# EAGLE board E-InkSmartMonitor (EAGLE 9.6.2)
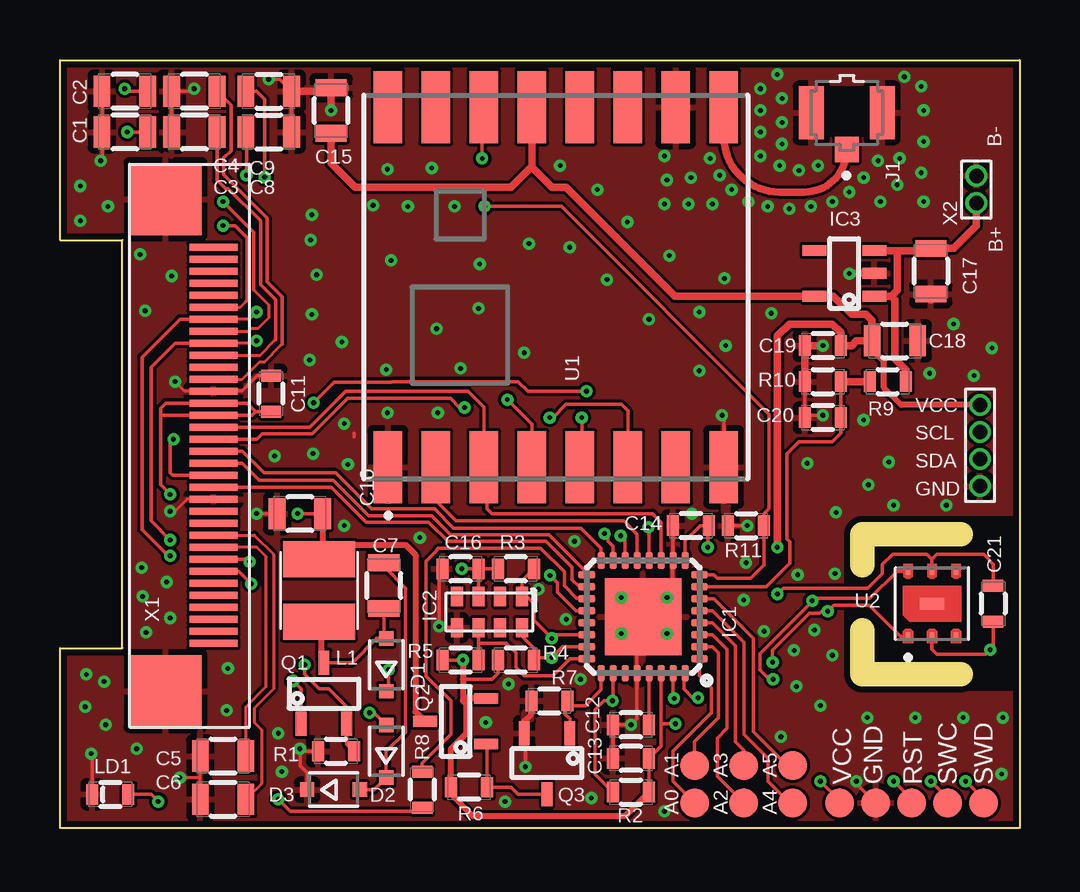
[diagram p0: board, top side]
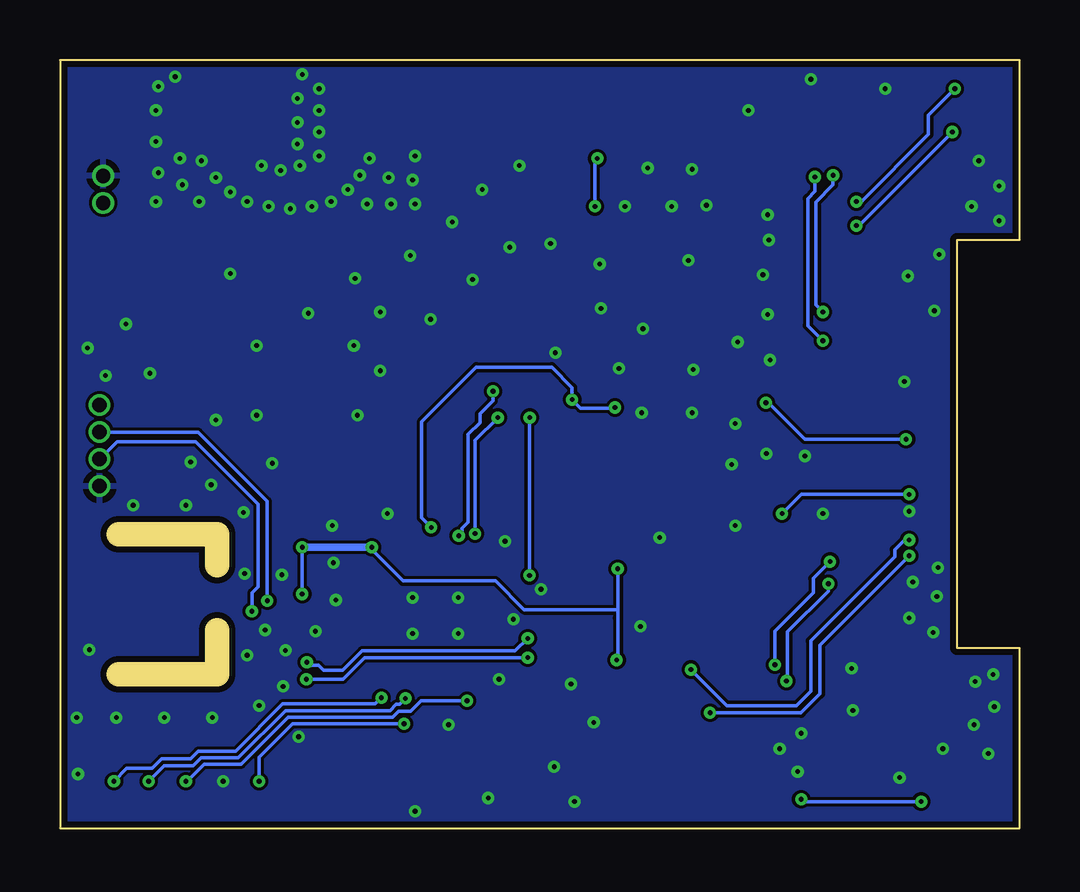
[diagram p1: board, bottom side, seen from below]

Size 40 x 32 mm. Coordinates in mm from the lower left corner, seen from the top.
Outline: 33.45,10.95 33.45,12.25 37.55,12.25
Outline: 33.45,8.25 33.45,6.4 37.55,6.4
Outline: 0,7.5 2.6,7.5 2.6,24.5 0,24.5 0,32 40,32 40,0 0,0 0,7.5
Copper layers (1*16): Top 0.035mm / dielectric 1.5mm / Bottom 0.035mm
Design rules "default": minimum track width 5mil, minimum drill 0.2mm, track to track 5mil, track to pad 6mil, pad to pad 6mil, via to via 6mil, smd to smd 6mil, copper to edge 10mil, drill to drill 0.4mm, minimum pad ring 6mil, minimum via ring 6mil, stop-mask expansion 4mil, vias tented up to drill 20mil, thermal gap 10mil

## Footprints (pad centres in the part's own frame; a part is rotated, then mirrored left to right if it is on the bottom)
TP = smd 1.2 x 1.2: P$1 0,0
0805 = smd 1.3 x 0.7: 1 0,0.95; 2 0,-0.95
0603 = smd 0.85 x 0.5: 1 0,0.75; 2 0,-0.75
SOD323-R = smd 0.6 x 0.6: A 1.1,0; C -1.1,0
MLF32-TH = smd 0.7 x 0.3: 1 -2.35,1.75; 2 -2.35,1.25; 3 -2.35,0.75; 4 -2.35,0.25; 5 -2.35,-0.25; 6 -2.35,-0.75; 7 -2.35,-1.25; 8 -2.35,-1.75; 17 2.35,-1.75; 18 2.35,-1.25; 19 2.35,-0.75; 20 2.35,-0.25; 21 2.35,0.25; 22 2.35,0.75; 23 2.35,1.25; 24 2.35,1.75 | smd 0.3 x 0.7: 9 -1.75,-2.35; 10 -1.25,-2.35; 11 -0.75,-2.35; 12 -0.25,-2.35; 13 0.25,-2.35; 14 0.75,-2.35; 15 1.25,-2.35; 16 1.75,-2.35; 25 1.75,2.35; 26 1.25,2.35; 27 0.75,2.35; 28 0.25,2.35; 29 -0.25,2.35; 30 -0.75,2.35; 31 -1.25,2.35; 32 -1.75,2.35 | smd 3.2 x 3.2: TH 0,0
C7_RTC = smd 0.8 x 0.5: 1 -0.65,1.35; 2 -0.65,0.45; 3 -0.65,-0.45; 4 -0.65,-1.35; 5 0.65,-1.35; 6 0.65,-0.45; 7 0.65,0.45; 8 0.65,1.35
SOT-23(5) = smd 0.45 x 1: 1 -0.95,-1.25; 2 0,-1.25; 3 0.95,-1.25; 4 0.95,1.25; 5 -0.95,1.25
IPEX_20279-001E-03 = smd 1.05 x 1: 1 1.525,0 | smd 2.2 x 1.05: 2 0,1.475; 3 0,-1.475
3232 = smd 1.5 x 3: M -1.3,0; P 1.3,0
0603_P = smd 0.85 x 0.5: 1 0,0.75; 2 0,-0.75
SOT-23(3) = smd 0.45 x 1: 1 -0.95,-1.25; 2 0.95,-1.25; 3 0,1.29
MOD_COM-13909 = smd 3 x 1.2: 1 -7.5,7; 2 -7.5,5; 3 -7.5,3; 4 -7.5,1; 5 -7.5,-1; 6 -7.5,-3; 7 -7.5,-5; 8 -7.5,-7; 9 7.5,-7; 10 7.5,-5; 11 7.5,-3; 12 7.5,-1; 13 7.5,1; 14 7.5,3; 15 7.5,5; 16 7.5,7
XDCR_SHT21 = smd 0.3 x 0.2: 1 -1.35,1; 2 -1.35,0; 3 -1.35,-1; 4 1.35,-1; 5 1.35,0; 6 1.35,1 | smd 0.5 x 1: 7 0,0
FFC_3405EINK = smd 3 x 3: M1 -10,0; M2 10.5,0 | smd 0.3 x 2: P$1 -8,-2; P$2 -7.5,-2; P$3 -7,-2; P$4 -6.5,-2; P$5 -6,-2; P$6 -5.5,-2; P$7 -5,-2; P$8 -4.5,-2; P$9 -4,-2; P$10 -3.5,-2; P$11 -3,-2; P$12 -2.5,-2; P$13 -2,-2; P$14 -1.5,-2; P$15 -1,-2; P$16 -0.5,-2; P$17 0,-2; P$18 0.5,-2; P$19 1,-2; P$20 1.5,-2; P$21 2,-2; P$22 2.5,-2; P$23 3,-2; P$24 3.5,-2; P$25 4,-2; P$26 4.5,-2; P$27 5,-2; P$28 5.5,-2; P$29 6,-2; P$30 6.5,-2; P$31 7,-2; P$32 7.5,-2; P$33 8,-2; P$34 8.5,-2
PIN_1MM_X2 = drill 0.6 pad 0.813: P$1 0.546,0.6; P$2 1.673,0.6
PIN_1MM_X4 = drill 0.6 pad 0.813: P$1 0.546,0.6; P$2 1.673,0.6; P$3 2.8,0.6; P$4 3.927,0.6

## Placement (x,y rotation side)
A0  TEST_POINT_D2MM  [TP]  26.45,1.05 0 top
A1  TEST_POINT_D2MM  [TP]  26.45,2.6 0 top
A2  TEST_POINT_D2MM  [TP]  28.5,1.05 0 top
A3  TEST_POINT_D2MM  [TP]  28.5,2.6 0 top
A4  TEST_POINT_D2MM  [TP]  30.55,1.05 0 top
A5  TEST_POINT_D2MM  [TP]  30.55,2.6 0 top
C1  1uf  [0805]  2.7,29 270 top
C2  1uf  [0805]  2.7,30.7 270 top
C3  1uf  [0805]  5.6,29 270 top
C4  1uf  [0805]  5.6,30.7 270 top
C5  1uf  [0805]  6.8,3 90 top
C6  1uf  [0805]  6.8,1.2 90 top
C7  4.7uf  [0805]  13.5,10.1 180 top
C8  1uf  [0805]  8.7,29 90 top
C9  1uf  [0805]  8.7,30.7 90 top
C10  10uf  [0805]  10,13.1 270 top
C11  0.1uf  [0603]  8.8,18.1 180 top
C12  0.1uf  [0603]  23.8,4.3 270 top
C13  0.1uf  [0603]  23.8,2.9 270 top
C14  0.1uf  [0603]  26.3,12.6 270 top
C15  1uf  [0805]  11.3,29.9 180 top
C16  0.1uf  [0603]  16.7,10.8 270 top
C17  1uf  [0805]  36.3,23.2 0 top
C18  150uf  [0805]  34.8,20.3 90 top
C19  0.1uf  [0603]  31.8,20.1 270 top
C20  0.1uf  [0603]  31.8,17.1 270 top
C21  0.1uf  [0603]  38.9,9.35 0 top
D1  [SOD323-R]  13.6,6.8 90 top
D2  [SOD323-R]  13.6,3.2 90 top
D3  [SOD323-R]  11.4,1.6 0 top
GND  TEST_POINT_D2MM  [TP]  34,1.05 0 top
IC1  SAMD20E17A-U  [MLF32-TH]  24.31,8.8 180 top
IC2  RTC_RV-8803-C7  [C7_RTC]  17.9,9 270 top
IC3  LDO_3.3V_SOT23(5)  [SOT-23(5)]  32.7,23.11 90 top
J1  20279-001E-03  [IPEX_20279-001E-03]  32.8,29.8 270 top
L1  450mR  [3232]  10.8,9.9 270 top
LD1  GLD  [0603_P]  2.1,1.4 90 top
Q1  BSS123SOT-23-3  [SOT-23(3)]  11,5.6 0 top
Q2  P_CH_SOT23SOT-23-3  [SOT-23(3)]  16.5,4.45 90 top
Q3  BSS123SOT-23-3  [SOT-23(3)]  20.3,2.7 180 top
R1  0R47  [0603]  11.5,3.2 90 top
R2  100K  [0603]  23.8,1.5 90 top
R3  100K  [0603]  19,10.8 270 top
R4  100K  [0603]  19,7 270 top
R5  100K  [0603]  16.7,7 270 top
R6  100K  [0603]  17.05,1.7 270 top
R7  100K  [0603]  20.4,5.3 90 top
R8  1K  [0603]  15.1,1.6 0 top
R9  100K  [0603]  34.5,18.6 90 top
R10  10K  [0603]  31.8,18.6 90 top
R11  10K  [0603]  28.6,12.6 90 top
RST  TEST_POINT_D2MM  [TP]  35.5,1.05 0 top
SWC  TEST_POINT_D2MM  [TP]  37,1.05 0 top
SWD  TEST_POINT_D2MM  [TP]  38.5,1.05 0 top
U1  COM-13909  [MOD_COM-13909]  20.67,22.54 90 top
U2  SHT21  [XDCR_SHT21]  36.35,9.35 90 top
VCC  TEST_POINT_D2MM  [TP]  32.5,1.05 0 top
X1  FFC_3405EINK  [FFC_3405EINK]  4.4,15.7 90 top
X2  PINHEADER_1MM_X22X_1MM_PIN  [PIN_1MM_X2]  38.8,25.5 90 top
X3  PINHEADER_1MM_X4  [PIN_1MM_X4]  38.95,13.7 90 top

## Library data of the parts
A0 A1-A5 C1-C21 GND L1 LD1 Q1-Q3 R1-R11 RST SWC SWD VCC = passive_components
D1-D3 = diode
IC1 = ATSAMD21J18A-AU
IC2 IC3 = my_IC
J1 = 20279-001E-03; AVAILABILITY: In Stock; CHECK_PRICES: https://www.snapeda.com/parts/20279-001E-03/I-PEX/view-part/?ref=eda; DESCRIPTION: 1 POS Vertical SMD Small form factor with big performance through 6 GHz connector,MHF, RF, micro-coaxial MHF I Receptacle; MF: I-PEX; MP: 20279-001E-03; PACKAGE: None; PRICE: None; PURCHASE-URL: https://www.snapeda.com/api/url_track_click_mouser/?unipart_id=3221458&manufacturer=I-PEX&part_name=20279-001E-03&search_term=None; SNAPEDA_LINK: https://www.snapeda.com/parts/20279-001E-03/I-PEX/view-part/?ref=snap
U1 = DL-RFM69HC; AVAILABILITY: Not in stock; CHECK_PRICES: https://www.snapeda.com/parts/RFM69HCW-315S2/HOPERF/view-part/?ref=eda; DESCRIPTION: General ISM < 1GHz Transceiver Module 915MHz Surface Mount; MF: HOPERF; MP: RFM69HCW-315S2; PACKAGE: Module SparkFun Electronics; PRICE: None; SNAPEDA_LINK: https://www.snapeda.com/parts/RFM69HCW-315S2/HOPERF/view-part/?ref=snap
U2 = SHT21; AVAILABILITY: In Stock; CHECK_PRICES: https://www.snapeda.com/parts/SHT21/Sensirion+AG/view-part/?ref=eda; DESCRIPTION: SENSOR HUMID/TEMP 3V I2C 2% SMD; MF: Sensirion AG; MP: SHT21; PACKAGE: DFN-6 Sensirion; PRICE: None; PURCHASE-URL: https://www.snapeda.com/api/url_track_click_mouser/?unipart_id=46060&manufacturer=Sensirion AG&part_name=SHT21&search_term=None; SNAPEDA_LINK: https://www.snapeda.com/parts/SHT21/Sensirion+AG/view-part/?ref=snap
X1-X3 = Custom connectors

## Nets
!EP_CS: IC1.16 X1.P$17
!RESET: IC1.26 R2.1 RST.P$1
!RF_CS: IC1.15 U1.5
!RST: IC1.14 X1.P$15
CLK: IC1.12 U1.4 X1.P$18
EP_BUSY: IC1.18 X1.P$14
EP_DC: IC1.17 X1.P$16
EP_EN: IC1.25 Q3.1 R7.2
EP_VCC: C10.1 C11.1 L1.M Q2.3 X1.P$20 X1.P$21
GDR_EP: Q1.1 X1.P$7
GND: C1.2 C2.2 C3.2 C4.2 C5.1 C6.1 C8.2 C9.2 C10.2 C11.2 C12.2 C13.2 C14.2 C15.2 C16.2 C17.2 C18.2 C19.2 C20.2 C21.2 D3.C GND.P$1 IC1.10 IC1.28 IC1.TH IC2.5 IC3.2 J1.2 J1.3 LD1.1 Q3.2 R1.1 R7.1 R10.1 R11.1 U1.1 U1.8 U1.10 U2.2 X1.M1 X1.M2 X1.P$13 X1.P$22 X2.P$2 X3.P$1
LD: IC1.19 R8.1
MISO: IC1.13 U1.2
MOSI: IC1.11 U1.3 X1.P$19
N$1: J1.1 U1.9
N$2: Q2.1 Q3.3 R6.1
N$3: C5.2 X1.P$9
N$4: C6.2 X1.P$10
N$5: C7.1 D1.A L1.P Q1.3
N$7: LD1.2 R8.2
N$8: C7.2 D2.C D3.A
N$15: C4.1 X1.P$23
N$16: C3.1 X1.P$25
N$18: C2.1 X1.P$27
N$20: C1.1 X1.P$29
PA00: A0.P$1 IC1.1
PA01: A1.P$1 IC1.2
PA02: A2.P$1 IC1.3
PA03: A3.P$1 IC1.4
PA04: A4.P$1 IC1.5
PA05: A5.P$1 IC1.6
PREVGH: C9.1 D1.C X1.P$26
PREVGL: C8.1 D2.A X1.P$28
RF_INT: IC1.8 R11.2 U1.14
RF_RST: IC1.20 U1.6
RSENSE_EP: Q1.2 R1.2 X1.P$8
RTC_INT: IC1.24 IC2.6 R5.1
SCL: IC1.23 IC2.8 R4.1 U2.6 X3.P$3
SDA: IC1.22 IC2.1 R3.1 U2.1 X3.P$2
SWC: IC1.31 SWC.P$1
SWD: IC1.32 SWD.P$1
VCC3V3: C13.1 C14.1 C15.1 C16.1 C18.1 C19.1 C21.1 IC1.9 IC1.30 IC2.3 IC3.5 Q2.2 R2.2 R3.2 R4.2 R5.2 R6.2 U1.13 U2.5 VCC.P$1 X3.P$4
VCORE: C12.1 IC1.29
VIN: C17.1 IC3.1 IC3.3 R9.2 X2.P$1
VMON: C20.1 IC1.7 R9.1 R10.2

## Tracks (layer width: path | path; a pad name or v marks a point on that pad's centre or on a via)
!EP_CS
  Top 0.152: X1.P$17 7.6,15.7 8.5,14.8 11.49,14.8 12.99,13.3 15.61,13.3 16.41,12.5 21.72,12.5 22.56,11.66 IC1.16
!RESET  (via drill 0.2)
  Top 0.15: IC1.26 23.06,5.33 v23.03,5.3 22.68,5.3 22.3,4.92 22.3,2.25 R2.1 | v34.75,1.95 35.5,1.2 RST.P$1
  Bottom 0.15: v23.03,5.3 24.95,5.3 25.38,4.87 25.88,4.87 26.13,4.62 30.48,4.62 32.45,2.65 34,2.65 34.7,1.95 v34.75,1.95
!RF_CS  (via drill 0.2)
  Top 0.152: IC1.15 23.06,11.74 22.84,11.95 22.84,12.13 v22.7,12.27 | v21.75,17.1 21.75,15.12 U1.5
  Bottom 0.152: v22.7,12.27 22.7,16.15 v21.75,17.1
!RST  (via drill 0.2)
  Top 0.15: 11.4,18.55 v10.58,17.72
  Top 0.152: X1.P$15 4.7,14.7 4.6,14.8 4.6,16.07 v4.73,16.2 | IC1.14 23.56,11.99 v23.37,12.17 | v21.95,18.2 19.5,18.2 19.1,18.6 13.85,18.6 13.82,18.57 11.42,18.57 11.4,18.55
  Bottom 0.152: v4.73,16.2 8.95,16.2 10.48,17.72 v10.58,17.72 | v23.37,12.17 23.37,12.22 23.23,12.37 23.23,12.49 22.98,12.74 22.98,16.42 22.5,16.89 22.5,17.25 21.95,17.8 v21.95,18.2
CLK  (via drill 0.2)
  Top 0.15: v16.86,17.52 16.66,17.52 16.28,17.9 11.99,17.9 10.52,16.42 8.42,16.42 8.2,16.2 X1.P$18 | v18.65,17.85 19.67,16.83 U1.4
  Top 0.152: IC1.12 24.56,12.49 v24.52,12.52
  Bottom 0.15: v16.86,17.52 16.88,17.5 18.3,17.5 v18.65,17.85
  Bottom 0.152: v24.52,12.52 24.92,12.92 24.92,16.92 22.65,19.2 19.5,19.2 18.65,18.35 v18.65,17.85
EP_BUSY
  Top 0.152: X1.P$14 11.3,14.2 12.76,12.74 15.37,12.74 16.17,11.94 20.26,11.94 21.35,10.86 21.35,10.35 21.65,10.05 IC1.18
EP_DC
  Top 0.152: X1.P$16 7.6,15.2 8.3,14.5 11.39,14.5 12.87,13.02 15.49,13.02 16.29,12.22 20.38,12.22 21.96,10.64 IC1.17
EP_EN
  Top 0.15: Q3.1 21.25,4.55 21.05,4.75 21.05,5.1 21.15,5.1 | 21.15,5.1 R7.2 | IC1.25 22.56,5.76 21.9,5.1 21.15,5.1
EP_VCC  (via drill 0.2)
  Top 0.152: 4.2,17.2 4.2,17.5 4.4,17.7 X1.P$21 7.8,17.7 8.15,17.35 | 4.2,17.2 4.2,14.3 v4.6,13.9 | C10.1 v9.9,13.1 | 4.2,17.2 X1.P$20 8,17.2 8.15,17.35 | 8.15,17.35 C11.1
  Top 0.254: C10.1 10.95,11.35 L1.M 11.4,11.8 14.4,11.8 14.82,11.38 14.82,4.84 Q2.3
  Bottom 0.152: v9.9,13.1 9.1,13.9 v4.6,13.9
GDR_EP  (via drill 0.2)
  Top 0.152: X1.P$7 7.45,10.7 v7.97,10.17 | v9.72,6.12 10.05,5.8 Q1.1
  Bottom 0.152: v9.72,6.12 9.67,6.18 9.67,8.18 7.97,9.87 v7.97,10.17
GND  (via drill 0.2)
  Top 0.127: X1.P$22 5.2,18.2 v4.8,18.6 | X1.P$13 5.3,13.7 4.8,13.2 v4.6,13.2 | C6.1 5.85,2.1 | 5.85,2.1 C5.1 | 5.85,2.1 v5,2.1
  Top 0.15: v8.7,31.2 9.15,31.2 C9.2 C8.2 | U1.1 13.67,15.64 | 12.25,16.45 12.25,16.3 | U1.8 27.67,17.13 v27.6,17.2 | D3.C 10.3,2.3 10,2.6 v10,3.3 | C14.2 IC1.10 25.54,11.13 25.54,10.25 24.31,9.02 IC1.TH 24.06,8.55 IC1.28 24.06,4.56 v23.8,4.3 C12.2 C13.2 | Q3.2 19.4,3.9 v19.4,2.55 | LD1.1 1.35,3.05 v1.3,3.1 | R11.1 v28.65,12.6 | R10.1 C20.2 31.15,17.2 v31.8,17.2 | GND.P$1 33.2,1.85 v33.2,1.95 | U2.2 36.35,7.45 36.55,7.25 38.6,7.25 v38.77,7.42 38.9,7.55 C21.2
  Top 0.152: R1.1 10.1,3.2 v10,3.3 | C10.2 v8.2,13.1 | X1.P$22 6.42,18.22 7.6,18.22 8.23,18.85 C11.2 | C2.2 C1.2 1.75,27.85 v1.7,27.8 | v5.6,30.8 5.5,30.7 C4.2 C3.2 | IC2.5 15.85,8.35 v15.8,8.4 15.8,10.65 C16.2
  Top 0.254: Q3.2 19.35,4.45 19.65,4.75 R7.1
  Top 0.305: C9.2 11.15,30.7 C15.2 v11.3,29.9 | IC3.2 v32.91,23.11 v32.9,23.1 | C17.2 36.3,22 | 35.7,20.35 C18.2 | R10.1 C19.2 v31.8,20.1
  other vias: 11.85,16.85 25.2,28 25.3,27 25.2,26 26.2,26 27.1,27.9 27.5,27.2 26.3,27.1 27.2,26 28,26.6 28.7,26.1 29.5,25.9 30.4,25.8 31.3,25.9 32.2,26.1 32.9,26.5 33.5,27.1 34.1,27.8 34.9,26.8 35,27.9 34.2,26.1 36,26.1 35.9,27.3 36,28.6 36,29.9 35.9,30.9 35.2,31.3 29.9,31.4 29.2,30.8 29.2,29.9 30.1,30.4 30.1,29.4 29.2,29 30.1,28.5 29.2,28 30,27.6 30.8,27.4 31.6,27.6 25.3,9.6 25.3,8.1 23.4,9.6 23.4,8.1 19.55,24.35 17.5,23.5 10.5,25.55 10.45,24.5 10.7,23.05 10.5,21.4 11.75,20.25 10.4,19.5 0.85,26.75 2,25.9 0.85,25.3 3.35,23.9 4.65,23 3.55,21.55 3.4,10.85 4.45,10.25 3.45,9.65 4.6,8.75 3.6,8.15 1.1,6.4 1.85,6.1 1.05,5.05 1.9,4.3 3.2,3.3 7,6.65 6.95,4.9 9.1,3.95 9.25,2.35 17.75,4.4 18.7,6 22.15,1.25 18.55,1.1 25.2,0.7 30.05,3.8 31.7,5.1 33.65,4.6 35.65,4.6 37.65,4.6 39.3,4.6 39.25,2.25 32.2,7.2 31.45,8.25 28.5,9.5 29.35,8.2 30.75,10.55 32.3,10.6 32.35,13.15 31.15,15.2 34.55,15.25 34.75,13.45 33.7,14.3 36.95,13.45 33.5,17 36.25,18.95 38.1,18.85 38.85,20 37.25,21 29.65,21.45 27.75,20.1 26.65,19.05 27.7,22.9 26.65,21.5 24.55,21.2 22.8,22.85 21.25,24.2 25.4,23.85 23.65,25.25 22.4,26.6 20.85,27.6 19.35,19.8 16.7,19.15 13.6,19.1 16.45,25.9 14.5,25.9 13.05,25.95 13.8,23.65 15.7,20.8 17.45,21.65 13.65,27.45 15.5,27.5 8.95,15.5 10.55,15.6 12,15.15 11.85,12.6 15,12.1 19.95,9.95 21.1,8.7 30.7,5.9 30.6,7.4 21.7,6.2 21.45,11.95 13.65,17.3 15.75,17.3 26.35,13.1 28.6,11.05
  pour Bottom: 0,32 40,32 40,0 0,0 0,7.5 2.6,7.5 2.6,24.5 0,24.5
  pour Top: 24.5,32 36.6,32 36.6,30.3 36.6,25.4 24.7,25.4 24.5,25.4
  pour Top: 0,32 0,24.5 2.6,24.5 2.6,7.5 0,7.5 0,0 40,0 40,5.65 33.3,5.65 32.65,6.3 32.65,12.4 33.3,13.05 40,13.05 40,32
LD
  Top 0.15: R8.1 15.1,2.7 16.3,3.9 16.3,5.3 15.27,6.33 15.27,11.12 15.7,11.55 15.7,11.6 15.76,11.66 20.04,11.66 21.02,10.68 21.02,10.09 21.53,9.57 21.94,9.57 IC1.19
MISO
  Top 0.152: IC1.13 24.06,12.24 23.5,12.8 16.5,12.8 15.67,13.63 U1.2
MOSI
  Top 0.15: U1.3 17.67,17.53 17,18.2 11.9,18.2 10.4,16.7 X1.P$19
  Top 0.152: U1.3 17.8,14.91 17.8,13.3 18,13.1 24.7,13.1 25.06,12.74 IC1.11
N$1
  Top 0.15: U1.9 27.67,28.83
  Top 0.305: 27.67,28.83 arc90 30,26.5 31.02,26.5 arc90 J1.1
N$2
  Top 0.15: Q3.3 19.09,1.41 18.8,1.7 R6.1 17.8,3.45 Q2.1
N$3
  Top 0.127: C5.2 7.75,5.05 8.6,5.9 8.6,11.3 8.2,11.7 X1.P$9
N$4
  Top 0.127: X1.P$10 8.1,12.2 8.9,11.4 8.9,5.8 8.1,5 8.1,4.4 8.4,4.1 8.4,1.85 C6.2
N$5
  Top 0.152: 10.9,8.5 L1.P | Q1.3 12.19,6.89 13.2,7.9 D1.A 13.5,8 C7.1
  Top 0.254: Q1.3 10.9,6.99 10.9,8.5
N$7  (via drill 0.2)
  Top 0.15: LD1.2 3.8,1.4 v4.1,1.1 | v9.1,1.2 9.6,0.7 14.95,0.7 R8.2
  Bottom 0.15: v9.1,1.2 9,1.1 v4.1,1.1
N$8
  Top 0.152: D3.A 13.1,1.6 D2.C 13.6,3.2 14.4,4 14.4,10 13.5,10.9 C7.2
N$15
  Top 0.127: X1.P$23 7.6,18.7 8.3,19.4 8.5,19.4 9.23,20.13
  Top 0.15: 9.23,20.13 9.26,20.16 9.26,22.13 8.64,22.76 8.64,25.41 6.83,27.22 6.83,27.93 7.13,28.23 7.13,30.12 C4.1
N$16
  Top 0.127: 8.97,20.34 8.31,19.68 6.42,19.68 X1.P$25
  Top 0.152: C3.1 6.55,26.98 6.9,26.63 7.02,26.63 8.36,25.29 8.36,22.64 8.99,22.01 8.99,20.35 8.97,20.34
N$18  (via drill 0.2)
  Top 0.127: X1.P$27 7.87,20.7 7.99,20.82 8.25,20.82 8.72,21.29 8.72,21.78 8.1,22.4
  Top 0.152: 8.1,22.4 8.08,22.42 8.08,24.82 v6.8,26.1 | C2.1 2.8,30.7 v2.7,30.8
  Bottom 0.152: v2.7,30.8 3.8,29.7 3.8,28.9 6.6,26.1 v6.8,26.1
N$20  (via drill 0.2)
  Top 0.127: X1.P$29 7.5,21.7 7.75,21.95
  Top 0.152: 7.75,21.95 7.8,22 7.8,24.6 7.3,25.1 v6.8,25.1 | C1.1 v2.8,29
  Bottom 0.152: v2.8,29 6.7,25.1 v6.8,25.1
PA00
  Top 0.15: IC1.1 26.66,6.34 27.15,5.85 27.15,4.8 25.55,3.2 25.55,1.95 A0.P$1
PA01
  Top 0.15: 26.63,7.52 IC1.2 27.2,7.55 27.45,7.3 27.45,4.6 26.45,3.6 A1.P$1 26.63,2.78
PA02
  Top 0.15: 28,1.05 A2.P$1 27.4,2.15 27.4,3.75 27.8,4.15 27.8,7.45 27.2,8.05 IC1.3
PA03
  Top 0.15: IC1.4 27.2,8.55 28.15,7.6 28.15,3.6 28.5,3.25 A3.P$1
PA04
  Top 0.15: A4.P$1 30.5,1.05 30.4,1.05 29.5,1.95 29.5,2.9 28.5,3.9 28.5,7.75 27.2,9.05 IC1.5
PA05
  Top 0.15: 30.56,2.62 30.55,2.62 | 30.55,2.62 30.3,2.62 28.9,4.02 28.9,7.9 27.25,9.55 IC1.6 | A5.P$1 30.55,2.62
PREVGH  (via drill 0.2)
  Top 0.127: v8.2,20.3 8.1,20.2 X1.P$26
  Top 0.15: v8.53,27.12 8.53,30.37 8.2,30.7 C9.1
  Top 0.152: X1.P$26 4.8,20.2 3.8,19.2 3.8,12.8 v4.6,12 | v13.7,6.6 13.7,5.8 D1.C
  Bottom 0.152: v8.2,20.3 8.83,20.93 8.83,26.23 8.53,26.52 v8.53,27.12 | v13.7,6.6 12.2,5.1 9.3,5.1 8.7,5.7 8.7,7.8 5.2,11.3 5.2,11.6 4.8,12 v4.6,12
PREVGL  (via drill 0.2)
  Top 0.127: v8.2,21.5 7.9,21.2 X1.P$28
  Top 0.15: v7.77,27.2 7.77,28.98 C8.1
  Top 0.152: X1.P$28 5,21.2 3.42,19.62 3.42,12.43 4.38,11.47 4.47,11.47 v4.6,11.34 | v12.9,4.8 13.1,4.8 D2.A
  Bottom 0.152: v7.77,27.2 7.77,26.8 8.5,26.07 8.5,21.8 v8.2,21.5 | v4.6,11.34 8.32,7.62 8.32,5.58 9.11,4.8 v12.9,4.8
RF_INT  (via drill 0.2)
  Top 0.15: IC1.8 27.26,10.55 27.41,10.4 28.8,10.4 29.35,10.95 R11.2 29.35,13.1 29.55,13.3 29.55,17.25 20.9,25.9 v17.7,25.9 | v17.6,27.9 17.6,29.97 U1.14
  Bottom 0.15: v17.7,25.9 17.7,27.8 v17.6,27.9
RF_RST  (via drill 0.2)
  Top 0.152: IC1.20 21.5,9.05 20.73,9.82 20.73,10.22 20.57,10.38 v20.43,10.53 | v20.42,17.1 20.55,17.1 21.1,17.65 23.4,17.65 23.67,17.38 U1.6
  Bottom 0.152: v20.43,10.53 v20.43,17.09 v20.42,17.1
RSENSE_EP  (via drill 0.2)
  Top 0.152: R1.2 11.95,3.5 Q1.2 11.95,5.05 11.2,5.8 10.8,5.8 10.2,6.4 v10.2,6.8 | X1.P$8 7.8,11.2 v7.9,11.1
  Bottom 0.152: v10.2,6.8 10.2,8.2 8.6,9.8 8.6,10.4 v7.9,11.1
RTC_INT
  Top 0.15: 17.45,7.7 18.6,7.7 19,7.3 19,7 19,6.7 19.35,6.35 20.55,6.35 21.25,7.05 IC1.24
  Top 0.152: R5.1 17.45,7.7 IC2.6 | 21.7,7.05 IC1.24
SCL  (via drill 0.2)
  Top 0.15: IC1.23 20.95,7.55 v20.5,7.1 19.85,7.1 R4.1 | U2.6 34.9,10.7 33.76,9.56 31.45,9.56 v31.36,9.47 31.36,9.45 29.18,7.27 29.18,6.6 29.58,6.2 v29.73,6.2
  Top 0.152: IC1.23 21.94,7.57 | IC2.8 19.25,8 19.75,7.5 R4.1
  Bottom 0.15: v29.73,6.2 28.2,6.2 27.3,7.1 v20.5,7.1 | v31.36,9.47 31.36,13.61 34.25,16.5 X3.P$3
SDA  (via drill 0.2)
  Top 0.15: IC1.22 20.65,8.05 v20.5,7.9 19.75,8.65 19.75,9.35 19.45,9.65 IC2.1 | U2.1 35.03,8 33.75,9.29 32.25,9.29 v32,9.03 31.75,9.03 31.66,8.94 31.24,8.94 29.71,7.41 v29.71,6.9
  Top 0.152: IC2.1 19.25,10.3 R3.1
  Bottom 0.15: v20.5,7.9 21.02,7.38 27.41,7.38 28.22,6.57 29,6.57 29.21,6.78 29.59,6.78 v29.71,6.9 | v32,9.03 32,9.8 31.75,10.05 31.75,13.5 34.35,16.1 37.62,16.1 X3.P$2
SWC  (via drill 0.2)
  Top 0.15: IC1.31 25.56,5.44 v25.6,5.4 | v36.3,1.95 37,1.25 SWC.P$1
  Bottom 0.15: v25.6,5.4 25.85,5.15 26,5.15 26.25,4.89 30.6,4.89 32.56,2.93 34.12,2.93 34.44,2.6 35.65,2.6 v36.3,1.95
SWD  (via drill 0.2)
  Top 0.15: v26.6,5.43 26.37,5.43 26,5.8 26,6.39 IC1.32 | v37.75,1.95 38.5,1.2 SWD.P$1
  Bottom 0.15: 26.75,5.3 26.62,5.43 v26.6,5.43 26.86,5.17 30.71,5.17 32.68,3.2 34.23,3.2 34.56,2.88 35.77,2.88 36.16,2.48 37.22,2.48 v37.75,1.95
VCC3V3  (via drill 0.2)
  Top 0.15: IC1.9 26.06,11.96 26.7,12.6 C14.1 27,12.55 v27,11.7 | IC1.30 25.06,4.35 | 25.06,4.35 25.06,3.41 C13.1 R2.2 | R4.2 18.25,6.45 18,6.2 16.8,6.2 | v25.66,4.34 v25.65,4.35 25.06,4.35 | VCC.P$1 32.5,1.15 v31.7,1.95 | U2.5 36.35,11.2 | 36.35,11.2 36.55,11.4 38.5,11.4 38.9,11 C21.1 | 36.35,11.2 36.14,11.41 34.71,11.41 34.29,10.99 34.29,10.6 33.68,10 30.15,10 v29.9,9.75
  Top 0.152: IC2.3 C16.1 | C16.1 R3.2 | C16.1 v16.75,10.8 | R5.2 v16.8,7 | R4.2
  Top 0.254: R2.2 23.55,0.5 17.2,0.5 16.3,1.4 R6.2 16.3,3.3 16.95,3.95 16.95,5.15 | 16.95,5.15 16.95,5.4 Q2.2 | v16.8,7 16.8,6.2 16.8,5.3 16.95,5.15 | X3.P$4 35.07,17.63 34.35,18.35 34.35,19.45 33.85,19.95 C18.1
  Top 0.305: C15.1 11.3,27.7 12.3,26.7 18.8,26.7 19.65,27.55 | U1.13 19.67,27.57 19.65,27.55 | 19.65,27.55 20.5,26.7 21.1,26.7 25.64,22.16 IC3.5 32.24,22.16 33,21.4 33.6,21.4 33.85,21.15 C18.1 33.2,20.3 33,20.1 C19.1 32.55,20.65 32.2,21 30.4,21 29.91,20.5 29.91,12.05 29.9,12.04 v29.9,11.7
  Bottom 0.15: 26.6,11.2 27,11.6 v27,11.7 | v25.66,4.34 30.31,4.34 31.7,2.95 v31.7,1.95 | v29.9,9.75 v29.9,11.7 | v29.9,11.7
  Bottom 0.152: v16.75,10.8 16.75,9.1 | 16.75,9.1 16.75,8.75 16.75,7.04 v16.8,7 | 26.6,11.2 25.7,10.3 21.85,10.3 20.65,9.1 16.75,9.1
  Bottom 0.305: v27,11.7 v29.9,11.7
VCORE
  Top 0.15: IC1.29 C12.1
VIN
  Top 0.305: IC3.1 34.66,22.16 | 34.66,22.16 34.9,22.4 34.9,24 34.84,24.06 | IC3.3 34.84,24.06 | 34.84,24.06 36.21,24.06 C17.1 37.25,24.15 38.2,25.1 X2.P$1 | R9.2 35.25,19.1 34.8,19.55 34.8,22.02 34.66,22.16
VMON
  Top 0.15: IC1.7 29.45,10.05 30.43,11.03 30.43,11.92 30.3,12.05 30.3,15.6 30.8,16.1 32.2,16.1 32.55,16.45 C20.1 32.55,18.55 32.6,18.6
  Top 0.305: R10.2 32.6,18.6 R9.1

## Text on the board
tPlace: B- | B+ | VCC / SCL / SDA / GND